# EAGLE board Hall Effect Power Panelized (EAGLE 7.6.0), part 1 of 2
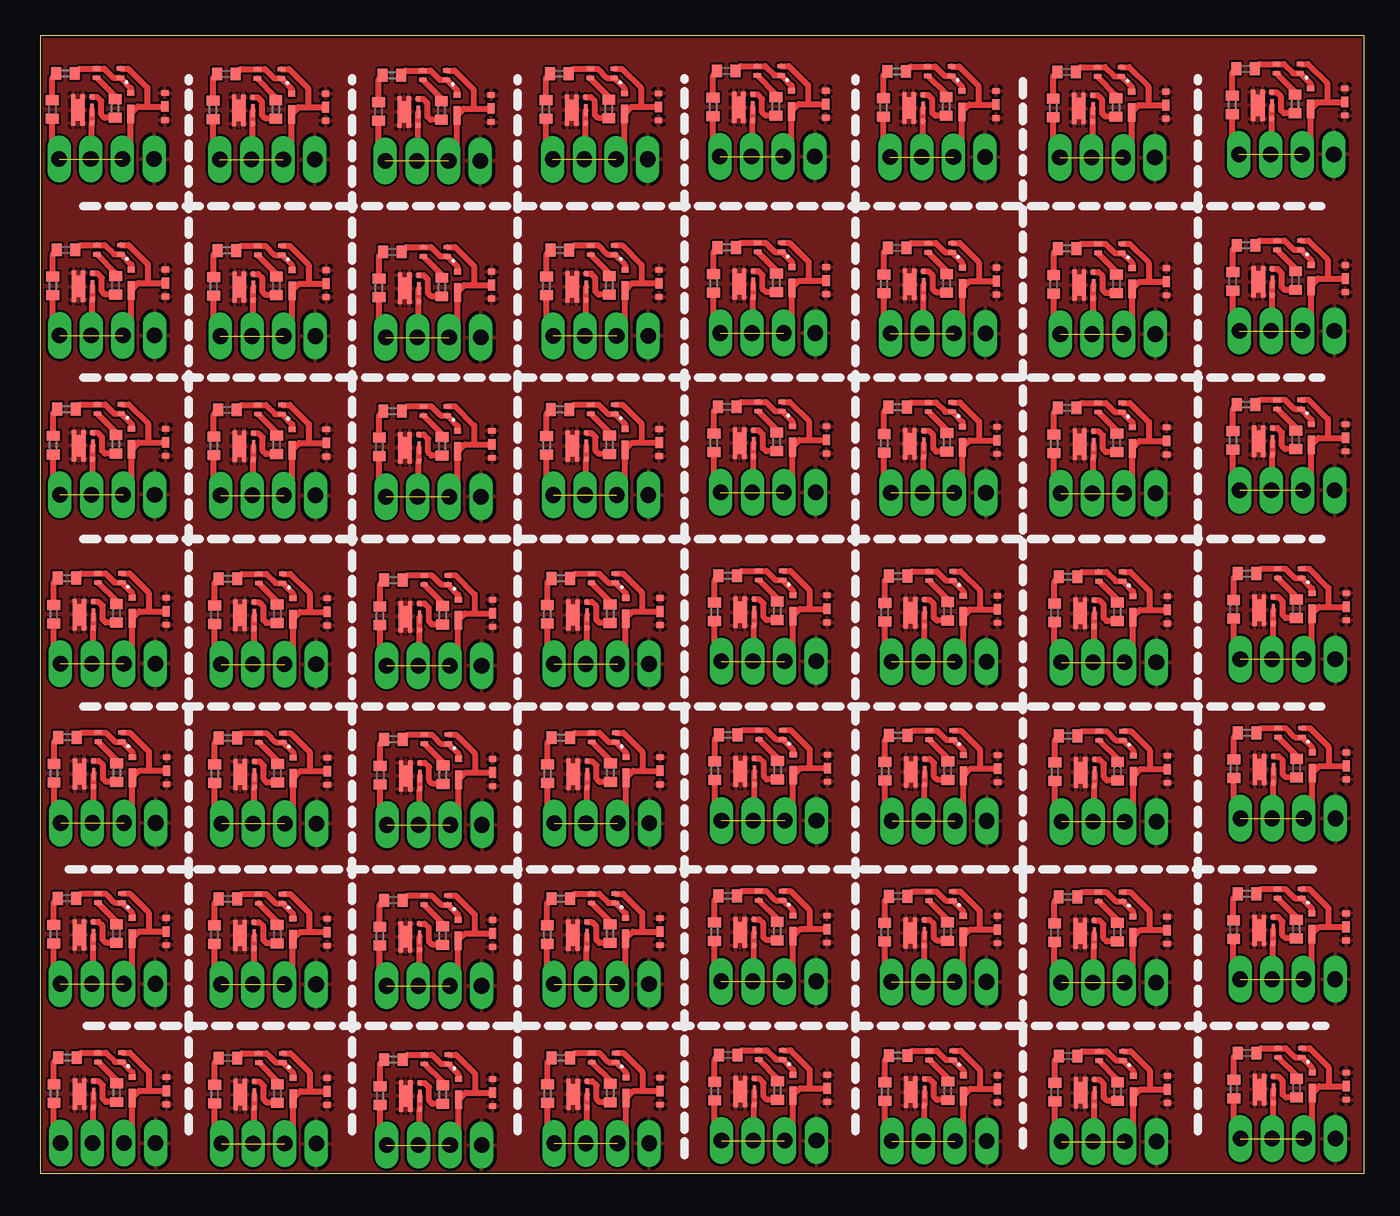
[diagram p0: board, top side]
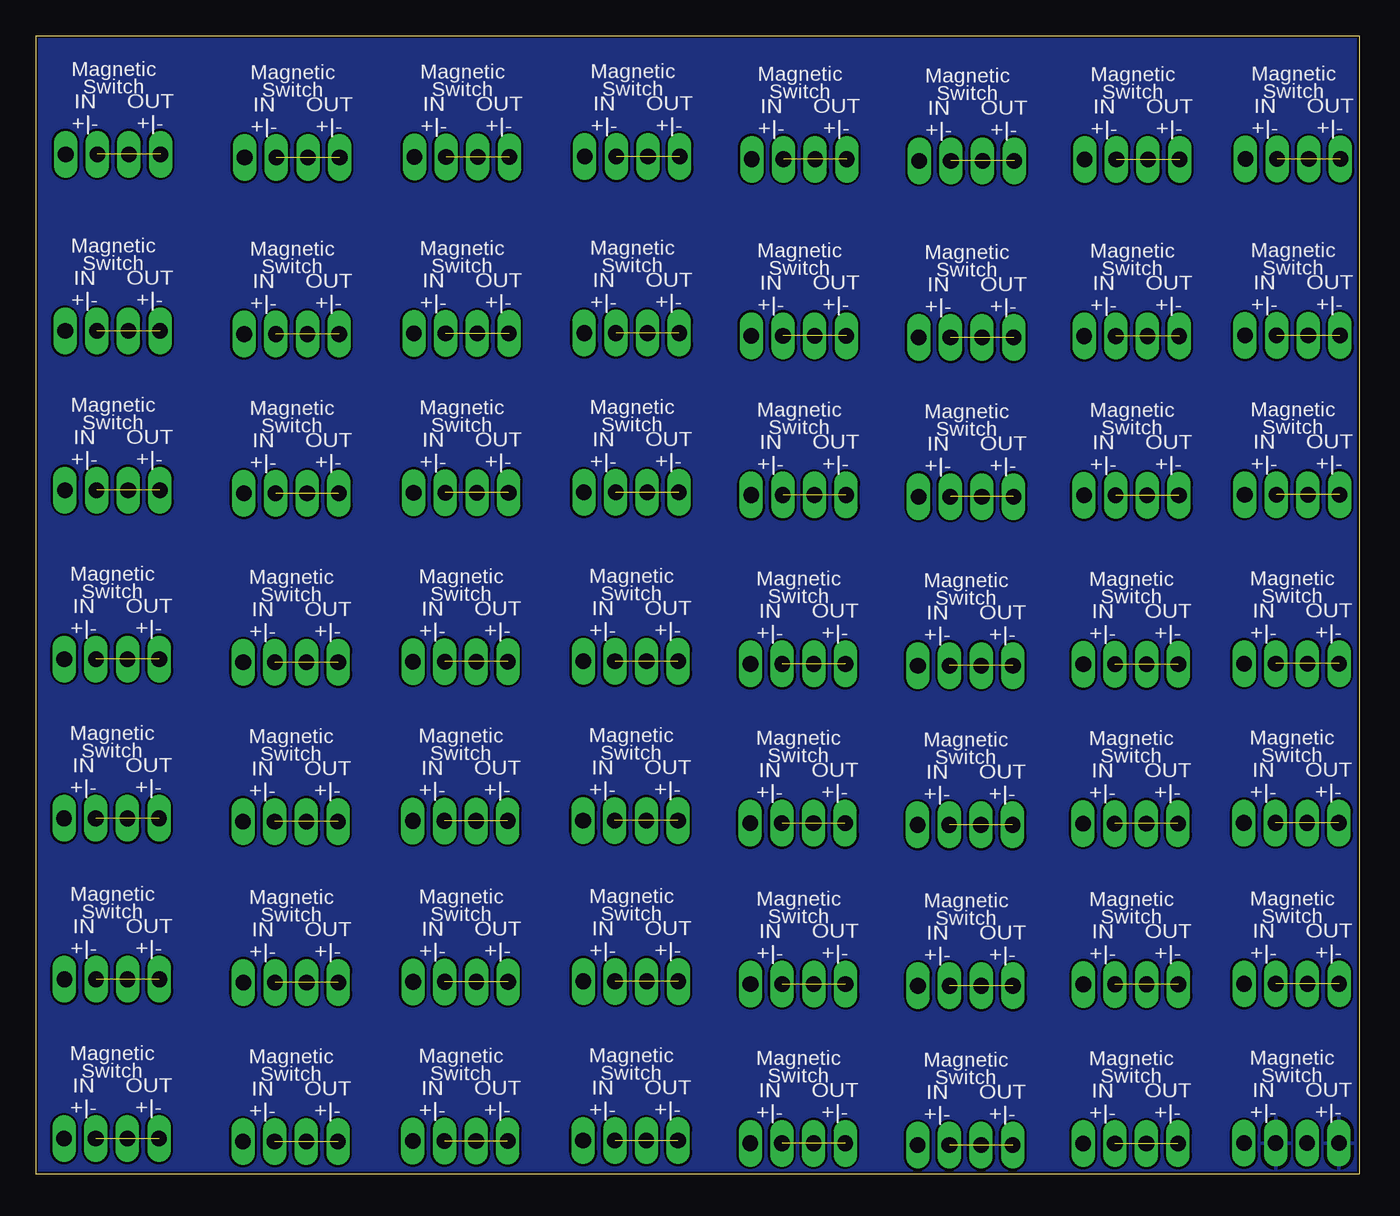
[diagram p1: board, bottom side, seen from below]

Size 93 x 80 mm. Coordinates in mm from the lower left corner, seen from the top.
Outline: 93,80 0,80 0,0 93,0 93,80
Copper layers (1*16): Top 0.035mm / dielectric 1.5mm / Bottom 0.035mm
Design rules "pcbway": minimum track width 6mil, minimum drill 12mil, track to track 6mil, track to pad 6mil, pad to pad 6mil, via to via 6mil, smd to smd 6mil, copper to edge 6mil, drill to drill 6mil, minimum pad ring 10mil, minimum via ring 8mil, stop-mask expansion 4mil, vias tented up to drill 0mil, thermal gap 10mil

## Footprints (pad centres in the part's own frame; a part is rotated, then mirrored left to right if it is on the bottom)
C0402 = smd 0.7 x 0.9: 1 -0.65,0; 2 0.65,0
HALL-MOSFET-NEW = smd 0.3 x 0.35: D#4 0,-0.925; D@2 -0.65,0.925; D@3 0,0.925; D@5 -0.65,-0.925; G@1 0.65,0.925; S@2 0.65,-0.925 | smd 0.95 x 1.5: D@1 -0.325,0 | smd 0.235 x 0.87: S@1 0.667,0
HALL-HALL-NEW = smd 0.3 x 0.52: CE -0.325,-0.84; GND -0.325,0.84; OUT 0.325,-0.84; VDD 0.325,0.84
HALL-REG-NEW = smd 0.4 x 0.5: 1 -0.95,0; 3 0.95,0; 4 0.95,2.4 | smd 0.75 x 0.5: 2 0,0 | smd 1.3 x 0.5: 5 -0.5,2.4
SINGLE-WIRE = drill 1.1 pad 1.27 long: P$1 0,0

## Placement (x,y rotation side)
3.1  RESISTORC0402  [C0402]  5.36,5.7 90 top
3.2  RESISTORC0402  [C0402]  12.24,5.62 90 top
3.3  RESISTORC0402  [C0402]  0.94,5.66 90 top
3.4  RESISTORC0402  [C0402]  16.65,5.66 90 top
3.5  RESISTORC0402  [C0402]  23.87,5.52 90 top
3.6  RESISTORC0402  [C0402]  28.28,5.57 90 top
3.7  RESISTORC0402  [C0402]  35.63,5.64 90 top
3.8  RESISTORC0402  [C0402]  40.04,5.69 90 top
3.9  RESISTORC0402  [C0402]  47.38,5.83 90 top
3.10  RESISTORC0402  [C0402]  51.79,5.88 90 top
3.11  RESISTORC0402  [C0402]  0.93,16.85 90 top
3.12  RESISTORC0402  [C0402]  5.34,16.9 90 top
3.13  RESISTORC0402  [C0402]  12.23,16.81 90 top
3.14  RESISTORC0402  [C0402]  16.64,16.86 90 top
3.15  RESISTORC0402  [C0402]  23.85,16.71 90 top
3.16  RESISTORC0402  [C0402]  28.26,16.76 90 top
3.17  RESISTORC0402  [C0402]  35.61,16.83 90 top
3.18  RESISTORC0402  [C0402]  40.03,16.88 90 top
3.19  RESISTORC0402  [C0402]  47.36,17.02 90 top
3.20  RESISTORC0402  [C0402]  51.77,17.07 90 top
3.21  RESISTORC0402  [C0402]  0.95,28.16 90 top
3.22  RESISTORC0402  [C0402]  5.36,28.2 90 top
3.23  RESISTORC0402  [C0402]  12.25,28.12 90 top
3.24  RESISTORC0402  [C0402]  16.66,28.16 90 top
3.25  RESISTORC0402  [C0402]  23.87,28.02 90 top
3.26  RESISTORC0402  [C0402]  28.28,28.07 90 top
3.27  RESISTORC0402  [C0402]  35.64,28.14 90 top
3.28  RESISTORC0402  [C0402]  40.05,28.19 90 top
3.29  RESISTORC0402  [C0402]  47.38,28.33 90 top
3.30  RESISTORC0402  [C0402]  51.8,28.37 90 top
3.31  RESISTORC0402  [C0402]  0.93,39.35 90 top
3.32  RESISTORC0402  [C0402]  5.34,39.4 90 top
3.33  RESISTORC0402  [C0402]  12.23,39.31 90 top
3.34  RESISTORC0402  [C0402]  16.64,39.35 90 top
3.35  RESISTORC0402  [C0402]  23.85,39.21 90 top
3.36  RESISTORC0402  [C0402]  28.27,39.26 90 top
3.37  RESISTORC0402  [C0402]  35.62,39.33 90 top
3.38  RESISTORC0402  [C0402]  40.03,39.38 90 top
3.39  RESISTORC0402  [C0402]  47.37,39.52 90 top
3.40  RESISTORC0402  [C0402]  51.78,39.57 90 top
3.41  RESISTORC0402  [C0402]  59.34,5.8 90 top
3.42  RESISTORC0402  [C0402]  63.76,5.84 90 top
3.43  RESISTORC0402  [C0402]  71.28,5.76 90 top
3.44  RESISTORC0402  [C0402]  75.69,5.8 90 top
3.45  RESISTORC0402  [C0402]  83.85,5.98 90 top
3.46  RESISTORC0402  [C0402]  88.26,6.02 90 top
3.47  RESISTORC0402  [C0402]  0.89,51.22 90 top
3.48  RESISTORC0402  [C0402]  5.3,51.27 90 top
3.49  RESISTORC0402  [C0402]  12.18,51.18 90 top
3.50  RESISTORC0402  [C0402]  16.6,51.23 90 top
3.51  RESISTORC0402  [C0402]  59.33,16.99 90 top
3.52  RESISTORC0402  [C0402]  63.74,17.04 90 top
3.53  RESISTORC0402  [C0402]  71.26,16.95 90 top
3.54  RESISTORC0402  [C0402]  75.67,17 90 top
3.55  RESISTORC0402  [C0402]  83.84,17.17 90 top
3.56  RESISTORC0402  [C0402]  88.25,17.22 90 top
3.57  RESISTORC0402  [C0402]  23.81,51.08 90 top
3.58  RESISTORC0402  [C0402]  28.22,51.13 90 top
3.59  RESISTORC0402  [C0402]  35.57,51.2 90 top
3.60  RESISTORC0402  [C0402]  39.98,51.25 90 top
3.61  RESISTORC0402  [C0402]  59.35,28.3 90 top
3.62  RESISTORC0402  [C0402]  63.76,28.34 90 top
3.63  RESISTORC0402  [C0402]  71.28,28.26 90 top
3.64  RESISTORC0402  [C0402]  75.69,28.3 90 top
3.65  RESISTORC0402  [C0402]  83.86,28.48 90 top
3.66  RESISTORC0402  [C0402]  88.27,28.52 90 top
3.67  RESISTORC0402  [C0402]  47.32,51.39 90 top
3.68  RESISTORC0402  [C0402]  51.73,51.44 90 top
3.69  RESISTORC0402  [C0402]  0.87,62.41 90 top
3.70  RESISTORC0402  [C0402]  5.28,62.46 90 top
3.71  RESISTORC0402  [C0402]  59.33,39.49 90 top
3.72  RESISTORC0402  [C0402]  63.74,39.54 90 top
3.73  RESISTORC0402  [C0402]  71.26,39.45 90 top
3.74  RESISTORC0402  [C0402]  75.68,39.49 90 top
3.75  RESISTORC0402  [C0402]  83.84,39.67 90 top
3.76  RESISTORC0402  [C0402]  88.25,39.72 90 top
3.77  RESISTORC0402  [C0402]  12.17,62.37 90 top
3.78  RESISTORC0402  [C0402]  16.58,62.42 90 top
3.79  RESISTORC0402  [C0402]  23.79,62.28 90 top
3.80  RESISTORC0402  [C0402]  28.2,62.32 90 top
3.81  RESISTORC0402  [C0402]  35.55,62.4 90 top
3.82  RESISTORC0402  [C0402]  39.97,62.44 90 top
3.83  RESISTORC0402  [C0402]  47.3,62.58 90 top
3.84  RESISTORC0402  [C0402]  51.71,62.63 90 top
3.85  RESISTORC0402  [C0402]  59.29,51.36 90 top
3.86  RESISTORC0402  [C0402]  63.7,51.41 90 top
3.87  RESISTORC0402  [C0402]  71.22,51.32 90 top
3.88  RESISTORC0402  [C0402]  75.63,51.37 90 top
3.89  RESISTORC0402  [C0402]  83.79,51.54 90 top
3.90  RESISTORC0402  [C0402]  88.21,51.59 90 top
3.91  RESISTORC0402  [C0402]  59.27,62.55 90 top
3.92  RESISTORC0402  [C0402]  63.68,62.6 90 top
3.93  RESISTORC0402  [C0402]  71.2,62.51 90 top
3.94  RESISTORC0402  [C0402]  75.61,62.56 90 top
3.95  RESISTORC0402  [C0402]  83.78,62.73 90 top
3.96  RESISTORC0402  [C0402]  88.19,62.78 90 top
3.97  RESISTORC0402  [C0402]  0.83,74.82 90 top
3.98  RESISTORC0402  [C0402]  5.25,74.86 90 top
3.99  RESISTORC0402  [C0402]  12.13,74.78 90 top
3.100  RESISTORC0402  [C0402]  16.54,74.82 90 top
3.101  RESISTORC0402  [C0402]  23.75,74.68 90 top
3.102  RESISTORC0402  [C0402]  28.17,74.73 90 top
3.103  RESISTORC0402  [C0402]  35.52,74.8 90 top
3.104  RESISTORC0402  [C0402]  39.93,74.85 90 top
3.105  RESISTORC0402  [C0402]  47.27,74.99 90 top
3.106  RESISTORC0402  [C0402]  51.68,75.03 90 top
3.107  RESISTORC0402  [C0402]  59.23,74.96 90 top
3.108  RESISTORC0402  [C0402]  63.64,75 90 top
3.109  RESISTORC0402  [C0402]  71.17,74.92 90 top
3.110  RESISTORC0402  [C0402]  75.58,74.96 90 top
3.111  RESISTORC0402  [C0402]  83.74,75.14 90 top
3.112  RESISTORC0402  [C0402]  88.15,75.18 90 top
4.7UF  CAPACITORC0402  [C0402]  1.88,8.18 0 top
4.7UF1  CAPACITORC0402  [C0402]  13.18,8.14 0 top
4.7UF2  CAPACITORC0402  [C0402]  24.8,8.04 0 top
4.7UF3  CAPACITORC0402  [C0402]  36.57,8.16 0 top
4.7UF4  CAPACITORC0402  [C0402]  48.32,8.35 0 top
4.7UF5  CAPACITORC0402  [C0402]  1.86,19.37 0 top
4.7UF6  CAPACITORC0402  [C0402]  13.16,19.33 0 top
4.7UF7  CAPACITORC0402  [C0402]  24.79,19.24 0 top
4.7UF8  CAPACITORC0402  [C0402]  36.55,19.35 0 top
4.7UF9  CAPACITORC0402  [C0402]  48.3,19.54 0 top
4.7UF10  CAPACITORC0402  [C0402]  1.89,30.68 0 top
4.7UF11  CAPACITORC0402  [C0402]  13.19,30.64 0 top
4.7UF12  CAPACITORC0402  [C0402]  24.81,30.54 0 top
4.7UF13  CAPACITORC0402  [C0402]  36.57,30.66 0 top
4.7UF14  CAPACITORC0402  [C0402]  48.32,30.85 0 top
4.7UF15  CAPACITORC0402  [C0402]  1.87,41.87 0 top
4.7UF16  CAPACITORC0402  [C0402]  13.17,41.83 0 top
4.7UF17  CAPACITORC0402  [C0402]  24.79,41.73 0 top
4.7UF18  CAPACITORC0402  [C0402]  36.56,41.85 0 top
4.7UF19  CAPACITORC0402  [C0402]  48.3,42.04 0 top
4.7UF20  CAPACITORC0402  [C0402]  60.28,8.32 0 top
4.7UF21  CAPACITORC0402  [C0402]  72.21,8.28 0 top
4.7UF22  CAPACITORC0402  [C0402]  84.79,8.5 0 top
4.7UF23  CAPACITORC0402  [C0402]  1.82,53.74 0 top
4.7UF24  CAPACITORC0402  [C0402]  13.12,53.7 0 top
4.7UF25  CAPACITORC0402  [C0402]  60.26,19.51 0 top
4.7UF26  CAPACITORC0402  [C0402]  72.2,19.47 0 top
4.7UF27  CAPACITORC0402  [C0402]  84.77,19.69 0 top
4.7UF28  CAPACITORC0402  [C0402]  24.74,53.61 0 top
4.7UF29  CAPACITORC0402  [C0402]  36.51,53.73 0 top
4.7UF30  CAPACITORC0402  [C0402]  60.29,30.82 0 top
4.7UF31  CAPACITORC0402  [C0402]  72.22,30.78 0 top
4.7UF32  CAPACITORC0402  [C0402]  84.8,31 0 top
4.7UF33  CAPACITORC0402  [C0402]  48.26,53.91 0 top
4.7UF34  CAPACITORC0402  [C0402]  1.81,64.94 0 top
4.7UF35  CAPACITORC0402  [C0402]  60.27,42.01 0 top
4.7UF36  CAPACITORC0402  [C0402]  72.2,41.97 0 top
4.7UF37  CAPACITORC0402  [C0402]  84.78,42.19 0 top
4.7UF38  CAPACITORC0402  [C0402]  13.1,64.89 0 top
4.7UF39  CAPACITORC0402  [C0402]  24.73,64.8 0 top
4.7UF40  CAPACITORC0402  [C0402]  36.49,64.92 0 top
4.7UF41  CAPACITORC0402  [C0402]  48.24,65.11 0 top
4.7UF42  CAPACITORC0402  [C0402]  60.22,53.88 0 top
4.7UF43  CAPACITORC0402  [C0402]  72.16,53.84 0 top
4.7UF44  CAPACITORC0402  [C0402]  84.73,54.06 0 top
4.7UF45  CAPACITORC0402  [C0402]  60.21,65.07 0 top
4.7UF46  CAPACITORC0402  [C0402]  72.14,65.03 0 top
4.7UF47  CAPACITORC0402  [C0402]  84.71,65.26 0 top
4.7UF48  CAPACITORC0402  [C0402]  1.77,77.34 0 top
4.7UF49  CAPACITORC0402  [C0402]  13.07,77.3 0 top
4.7UF50  CAPACITORC0402  [C0402]  24.69,77.2 0 top
4.7UF51  CAPACITORC0402  [C0402]  36.46,77.32 0 top
4.7UF52  CAPACITORC0402  [C0402]  48.2,77.51 0 top
4.7UF53  CAPACITORC0402  [C0402]  60.17,77.48 0 top
4.7UF54  CAPACITORC0402  [C0402]  72.1,77.44 0 top
4.7UF55  CAPACITORC0402  [C0402]  84.68,77.66 0 top
U$1  HALL-MOSFET-NEW  [HALL-MOSFET-NEW]  3.07,5.61 0 top
U$2  HALL-HALL-NEW  [HALL-HALL-NEW]  4.89,8.2 270 top
U$3  HALL-REG-NEW  [HALL-REG-NEW]  8.85,5.85 90 top
U$4  SINGLE-WIRE  [SINGLE-WIRE]  1.42,2.17 0 top
U$5  SINGLE-WIRE  [SINGLE-WIRE]  3.64,2.17 0 top
U$6  SINGLE-WIRE  [SINGLE-WIRE]  8.09,2.17 0 top
U$7  SINGLE-WIRE  [SINGLE-WIRE]  5.86,2.17 0 top
U$8  HALL-MOSFET-NEW  [HALL-MOSFET-NEW]  14.37,5.57 0 top
U$9  HALL-HALL-NEW  [HALL-HALL-NEW]  16.19,8.16 270 top
U$10  HALL-REG-NEW  [HALL-REG-NEW]  20.15,5.81 90 top
U$11  SINGLE-WIRE  [SINGLE-WIRE]  12.72,2.13 0 top
U$12  SINGLE-WIRE  [SINGLE-WIRE]  14.94,2.13 0 top
U$13  SINGLE-WIRE  [SINGLE-WIRE]  19.39,2.13 0 top
U$14  SINGLE-WIRE  [SINGLE-WIRE]  17.16,2.13 0 top
U$15  HALL-MOSFET-NEW  [HALL-MOSFET-NEW]  25.99,5.48 0 top
U$16  HALL-HALL-NEW  [HALL-HALL-NEW]  27.81,8.06 270 top
U$17  HALL-REG-NEW  [HALL-REG-NEW]  31.78,5.71 90 top
U$18  SINGLE-WIRE  [SINGLE-WIRE]  24.34,2.03 0 top
U$19  SINGLE-WIRE  [SINGLE-WIRE]  26.56,2.03 0 top
U$20  SINGLE-WIRE  [SINGLE-WIRE]  31.01,2.03 0 top
U$21  SINGLE-WIRE  [SINGLE-WIRE]  28.79,2.03 0 top
U$22  HALL-MOSFET-NEW  [HALL-MOSFET-NEW]  37.76,5.6 0 top
U$23  HALL-HALL-NEW  [HALL-HALL-NEW]  39.58,8.18 270 top
U$24  HALL-REG-NEW  [HALL-REG-NEW]  43.54,5.83 90 top
U$25  SINGLE-WIRE  [SINGLE-WIRE]  36.1,2.15 0 top
U$26  SINGLE-WIRE  [SINGLE-WIRE]  38.33,2.15 0 top
U$27  SINGLE-WIRE  [SINGLE-WIRE]  42.78,2.15 0 top
U$28  SINGLE-WIRE  [SINGLE-WIRE]  40.55,2.15 0 top
U$29  HALL-MOSFET-NEW  [HALL-MOSFET-NEW]  49.5,5.78 0 top
U$30  HALL-HALL-NEW  [HALL-HALL-NEW]  51.33,8.37 270 top
U$31  HALL-REG-NEW  [HALL-REG-NEW]  55.29,6.02 90 top
U$32  SINGLE-WIRE  [SINGLE-WIRE]  47.85,2.34 0 top
U$33  SINGLE-WIRE  [SINGLE-WIRE]  50.08,2.34 0 top
U$34  SINGLE-WIRE  [SINGLE-WIRE]  54.52,2.34 0 top
U$35  SINGLE-WIRE  [SINGLE-WIRE]  52.3,2.34 0 top
U$36  HALL-MOSFET-NEW  [HALL-MOSFET-NEW]  3.05,16.8 0 top
U$37  HALL-HALL-NEW  [HALL-HALL-NEW]  4.87,19.39 270 top
U$38  HALL-REG-NEW  [HALL-REG-NEW]  8.84,17.04 90 top
U$39  SINGLE-WIRE  [SINGLE-WIRE]  1.4,13.36 0 top
U$40  SINGLE-WIRE  [SINGLE-WIRE]  3.62,13.36 0 top
U$41  SINGLE-WIRE  [SINGLE-WIRE]  8.07,13.36 0 top
U$42  SINGLE-WIRE  [SINGLE-WIRE]  5.85,13.36 0 top
U$43  HALL-MOSFET-NEW  [HALL-MOSFET-NEW]  14.35,16.76 0 top
U$44  HALL-HALL-NEW  [HALL-HALL-NEW]  16.17,19.35 270 top
U$45  HALL-REG-NEW  [HALL-REG-NEW]  20.13,17 90 top
U$46  SINGLE-WIRE  [SINGLE-WIRE]  12.7,13.32 0 top
U$47  SINGLE-WIRE  [SINGLE-WIRE]  14.92,13.32 0 top
U$48  SINGLE-WIRE  [SINGLE-WIRE]  19.37,13.32 0 top
U$49  SINGLE-WIRE  [SINGLE-WIRE]  17.14,13.32 0 top
U$50  HALL-MOSFET-NEW  [HALL-MOSFET-NEW]  25.97,16.67 0 top
U$51  HALL-HALL-NEW  [HALL-HALL-NEW]  27.8,19.25 270 top
U$52  HALL-REG-NEW  [HALL-REG-NEW]  31.76,16.9 90 top
U$53  SINGLE-WIRE  [SINGLE-WIRE]  24.32,13.22 0 top
U$54  SINGLE-WIRE  [SINGLE-WIRE]  26.55,13.22 0 top
U$55  SINGLE-WIRE  [SINGLE-WIRE]  30.99,13.22 0 top
U$56  SINGLE-WIRE  [SINGLE-WIRE]  28.77,13.22 0 top
U$57  HALL-MOSFET-NEW  [HALL-MOSFET-NEW]  37.74,16.79 0 top
U$58  HALL-HALL-NEW  [HALL-HALL-NEW]  39.56,19.37 270 top
U$59  HALL-REG-NEW  [HALL-REG-NEW]  43.52,17.02 90 top
U$60  SINGLE-WIRE  [SINGLE-WIRE]  36.09,13.34 0 top
U$61  SINGLE-WIRE  [SINGLE-WIRE]  38.31,13.34 0 top
U$62  SINGLE-WIRE  [SINGLE-WIRE]  42.76,13.34 0 top
U$63  SINGLE-WIRE  [SINGLE-WIRE]  40.53,13.34 0 top
U$64  HALL-MOSFET-NEW  [HALL-MOSFET-NEW]  49.49,16.97 0 top
U$65  HALL-HALL-NEW  [HALL-HALL-NEW]  51.31,19.56 270 top
U$66  HALL-REG-NEW  [HALL-REG-NEW]  55.27,17.21 90 top
U$67  SINGLE-WIRE  [SINGLE-WIRE]  47.83,13.53 0 top
U$68  SINGLE-WIRE  [SINGLE-WIRE]  50.06,13.53 0 top
U$69  SINGLE-WIRE  [SINGLE-WIRE]  54.51,13.53 0 top
U$70  SINGLE-WIRE  [SINGLE-WIRE]  52.28,13.53 0 top
U$71  HALL-MOSFET-NEW  [HALL-MOSFET-NEW]  3.08,28.11 0 top
U$72  HALL-HALL-NEW  [HALL-HALL-NEW]  4.9,30.7 270 top
U$73  HALL-REG-NEW  [HALL-REG-NEW]  8.86,28.35 90 top
U$74  SINGLE-WIRE  [SINGLE-WIRE]  1.42,24.67 0 top
U$75  SINGLE-WIRE  [SINGLE-WIRE]  3.65,24.67 0 top
U$76  SINGLE-WIRE  [SINGLE-WIRE]  8.09,24.67 0 top
U$77  SINGLE-WIRE  [SINGLE-WIRE]  5.87,24.67 0 top
U$78  HALL-MOSFET-NEW  [HALL-MOSFET-NEW]  14.37,28.07 0 top
U$79  HALL-HALL-NEW  [HALL-HALL-NEW]  16.2,30.66 270 top
U$80  HALL-REG-NEW  [HALL-REG-NEW]  20.16,28.31 90 top
U$81  SINGLE-WIRE  [SINGLE-WIRE]  12.72,24.63 0 top
U$82  SINGLE-WIRE  [SINGLE-WIRE]  14.95,24.63 0 top
U$83  SINGLE-WIRE  [SINGLE-WIRE]  19.39,24.63 0 top
U$84  SINGLE-WIRE  [SINGLE-WIRE]  17.17,24.63 0 top
U$85  HALL-MOSFET-NEW  [HALL-MOSFET-NEW]  26,27.98 0 top
U$86  HALL-HALL-NEW  [HALL-HALL-NEW]  27.82,30.56 270 top
U$87  HALL-REG-NEW  [HALL-REG-NEW]  31.78,28.21 90 top
U$88  SINGLE-WIRE  [SINGLE-WIRE]  24.34,24.53 0 top
U$89  SINGLE-WIRE  [SINGLE-WIRE]  26.57,24.53 0 top
U$90  SINGLE-WIRE  [SINGLE-WIRE]  31.02,24.53 0 top
U$91  SINGLE-WIRE  [SINGLE-WIRE]  28.79,24.53 0 top
U$92  HALL-MOSFET-NEW  [HALL-MOSFET-NEW]  37.76,28.09 0 top
U$93  HALL-HALL-NEW  [HALL-HALL-NEW]  39.58,30.68 270 top
U$94  HALL-REG-NEW  [HALL-REG-NEW]  43.55,28.33 90 top
U$95  SINGLE-WIRE  [SINGLE-WIRE]  36.11,24.65 0 top
U$96  SINGLE-WIRE  [SINGLE-WIRE]  38.33,24.65 0 top
U$97  SINGLE-WIRE  [SINGLE-WIRE]  42.78,24.65 0 top
U$98  SINGLE-WIRE  [SINGLE-WIRE]  40.56,24.65 0 top
U$99  HALL-MOSFET-NEW  [HALL-MOSFET-NEW]  49.51,28.28 0 top
U$100  HALL-HALL-NEW  [HALL-HALL-NEW]  51.33,30.87 270 top
U$101  HALL-REG-NEW  [HALL-REG-NEW]  55.29,28.52 90 top
U$102  SINGLE-WIRE  [SINGLE-WIRE]  47.86,24.84 0 top
U$103  SINGLE-WIRE  [SINGLE-WIRE]  50.08,24.84 0 top
U$104  SINGLE-WIRE  [SINGLE-WIRE]  54.53,24.84 0 top
U$105  SINGLE-WIRE  [SINGLE-WIRE]  52.3,24.84 0 top
U$106  HALL-MOSFET-NEW  [HALL-MOSFET-NEW]  3.06,39.3 0 top
U$107  HALL-HALL-NEW  [HALL-HALL-NEW]  4.88,41.89 270 top
U$108  HALL-REG-NEW  [HALL-REG-NEW]  8.84,39.54 90 top
U$109  SINGLE-WIRE  [SINGLE-WIRE]  1.4,35.86 0 top
U$110  SINGLE-WIRE  [SINGLE-WIRE]  3.63,35.86 0 top
U$111  SINGLE-WIRE  [SINGLE-WIRE]  8.08,35.86 0 top
U$112  SINGLE-WIRE  [SINGLE-WIRE]  5.85,35.86 0 top
U$113  HALL-MOSFET-NEW  [HALL-MOSFET-NEW]  14.36,39.26 0 top
U$114  HALL-HALL-NEW  [HALL-HALL-NEW]  16.18,41.85 270 top
U$115  HALL-REG-NEW  [HALL-REG-NEW]  20.14,39.5 90 top
U$116  SINGLE-WIRE  [SINGLE-WIRE]  12.7,35.82 0 top
U$117  SINGLE-WIRE  [SINGLE-WIRE]  14.93,35.82 0 top
U$118  SINGLE-WIRE  [SINGLE-WIRE]  19.38,35.82 0 top
U$119  SINGLE-WIRE  [SINGLE-WIRE]  17.15,35.82 0 top
U$120  HALL-MOSFET-NEW  [HALL-MOSFET-NEW]  25.98,39.17 0 top
U$121  HALL-HALL-NEW  [HALL-HALL-NEW]  27.8,41.75 270 top
U$122  HALL-REG-NEW  [HALL-REG-NEW]  31.76,39.4 90 top
U$123  SINGLE-WIRE  [SINGLE-WIRE]  24.33,35.72 0 top
U$124  SINGLE-WIRE  [SINGLE-WIRE]  26.55,35.72 0 top
U$125  SINGLE-WIRE  [SINGLE-WIRE]  31,35.72 0 top
U$126  SINGLE-WIRE  [SINGLE-WIRE]  28.77,35.72 0 top
U$127  HALL-MOSFET-NEW  [HALL-MOSFET-NEW]  37.74,39.29 0 top
U$128  HALL-HALL-NEW  [HALL-HALL-NEW]  39.57,41.87 270 top
U$129  HALL-REG-NEW  [HALL-REG-NEW]  43.53,39.52 90 top
U$130  SINGLE-WIRE  [SINGLE-WIRE]  36.09,35.84 0 top
U$131  SINGLE-WIRE  [SINGLE-WIRE]  38.32,35.84 0 top
U$132  SINGLE-WIRE  [SINGLE-WIRE]  42.76,35.84 0 top
U$133  SINGLE-WIRE  [SINGLE-WIRE]  40.54,35.84 0 top
U$134  HALL-MOSFET-NEW  [HALL-MOSFET-NEW]  49.49,39.47 0 top
U$135  HALL-HALL-NEW  [HALL-HALL-NEW]  51.31,42.06 270 top
U$136  HALL-REG-NEW  [HALL-REG-NEW]  55.28,39.71 90 top
U$137  SINGLE-WIRE  [SINGLE-WIRE]  47.84,36.03 0 top
U$138  SINGLE-WIRE  [SINGLE-WIRE]  50.06,36.03 0 top
U$139  SINGLE-WIRE  [SINGLE-WIRE]  54.51,36.03 0 top
U$140  SINGLE-WIRE  [SINGLE-WIRE]  52.29,36.03 0 top
U$141  HALL-MOSFET-NEW  [HALL-MOSFET-NEW]  61.47,5.75 0 top
U$142  HALL-HALL-NEW  [HALL-HALL-NEW]  63.29,8.34 270 top
U$143  HALL-REG-NEW  [HALL-REG-NEW]  67.25,5.99 90 top
U$144  SINGLE-WIRE  [SINGLE-WIRE]  59.82,2.31 0 top
U$145  SINGLE-WIRE  [SINGLE-WIRE]  62.04,2.31 0 top
U$146  SINGLE-WIRE  [SINGLE-WIRE]  66.49,2.31 0 top
U$147  SINGLE-WIRE  [SINGLE-WIRE]  64.26,2.31 0 top
U$148  HALL-MOSFET-NEW  [HALL-MOSFET-NEW]  73.4,5.71 0 top
U$149  HALL-HALL-NEW  [HALL-HALL-NEW]  75.22,8.3 270 top
U$150  HALL-REG-NEW  [HALL-REG-NEW]  79.19,5.95 90 top
U$151  SINGLE-WIRE  [SINGLE-WIRE]  71.75,2.27 0 top
U$152  SINGLE-WIRE  [SINGLE-WIRE]  73.97,2.27 0 top
U$153  SINGLE-WIRE  [SINGLE-WIRE]  78.42,2.27 0 top
U$154  SINGLE-WIRE  [SINGLE-WIRE]  76.2,2.27 0 top
U$155  HALL-MOSFET-NEW  [HALL-MOSFET-NEW]  85.98,5.93 0 top
U$156  HALL-HALL-NEW  [HALL-HALL-NEW]  87.8,8.52 270 top
U$157  HALL-REG-NEW  [HALL-REG-NEW]  91.76,6.17 90 top
U$158  SINGLE-WIRE  [SINGLE-WIRE]  84.33,2.49 0 top
U$159  SINGLE-WIRE  [SINGLE-WIRE]  86.55,2.49 0 top
U$160  SINGLE-WIRE  [SINGLE-WIRE]  91,2.49 0 top
U$161  SINGLE-WIRE  [SINGLE-WIRE]  88.77,2.49 0 top
U$162  HALL-MOSFET-NEW  [HALL-MOSFET-NEW]  3.01,51.18 0 top
U$163  HALL-HALL-NEW  [HALL-HALL-NEW]  4.83,53.76 270 top
U$164  HALL-REG-NEW  [HALL-REG-NEW]  8.8,51.41 90 top
U$165  SINGLE-WIRE  [SINGLE-WIRE]  1.36,47.73 0 top
U$166  SINGLE-WIRE  [SINGLE-WIRE]  3.58,47.73 0 top
U$167  SINGLE-WIRE  [SINGLE-WIRE]  8.03,47.73 0 top
U$168  SINGLE-WIRE  [SINGLE-WIRE]  5.81,47.73 0 top
U$169  HALL-MOSFET-NEW  [HALL-MOSFET-NEW]  14.31,51.14 0 top
U$170  HALL-HALL-NEW  [HALL-HALL-NEW]  16.13,53.72 270 top
U$171  HALL-REG-NEW  [HALL-REG-NEW]  20.09,51.37 90 top
U$172  SINGLE-WIRE  [SINGLE-WIRE]  12.66,47.69 0 top
U$173  SINGLE-WIRE  [SINGLE-WIRE]  14.88,47.69 0 top
U$174  SINGLE-WIRE  [SINGLE-WIRE]  19.33,47.69 0 top
U$175  SINGLE-WIRE  [SINGLE-WIRE]  17.1,47.69 0 top
U$176  HALL-MOSFET-NEW  [HALL-MOSFET-NEW]  61.45,16.94 0 top
U$177  HALL-HALL-NEW  [HALL-HALL-NEW]  63.27,19.53 270 top
U$178  HALL-REG-NEW  [HALL-REG-NEW]  67.24,17.18 90 top
U$179  SINGLE-WIRE  [SINGLE-WIRE]  59.8,13.5 0 top
U$180  SINGLE-WIRE  [SINGLE-WIRE]  62.02,13.5 0 top
U$181  SINGLE-WIRE  [SINGLE-WIRE]  66.47,13.5 0 top
U$182  SINGLE-WIRE  [SINGLE-WIRE]  64.25,13.5 0 top
U$183  HALL-MOSFET-NEW  [HALL-MOSFET-NEW]  73.39,16.9 0 top
U$184  HALL-HALL-NEW  [HALL-HALL-NEW]  75.21,19.49 270 top
U$185  HALL-REG-NEW  [HALL-REG-NEW]  79.17,17.14 90 top
U$186  SINGLE-WIRE  [SINGLE-WIRE]  71.73,13.46 0 top
U$187  SINGLE-WIRE  [SINGLE-WIRE]  73.96,13.46 0 top
U$188  SINGLE-WIRE  [SINGLE-WIRE]  78.4,13.46 0 top
U$189  SINGLE-WIRE  [SINGLE-WIRE]  76.18,13.46 0 top
U$190  HALL-MOSFET-NEW  [HALL-MOSFET-NEW]  85.96,17.12 0 top
U$191  HALL-HALL-NEW  [HALL-HALL-NEW]  87.78,19.71 270 top
U$192  HALL-REG-NEW  [HALL-REG-NEW]  91.74,17.36 90 top
U$193  SINGLE-WIRE  [SINGLE-WIRE]  84.31,13.68 0 top
U$194  SINGLE-WIRE  [SINGLE-WIRE]  86.53,13.68 0 top
U$195  SINGLE-WIRE  [SINGLE-WIRE]  90.98,13.68 0 top
U$196  SINGLE-WIRE  [SINGLE-WIRE]  88.76,13.68 0 top
U$197  HALL-MOSFET-NEW  [HALL-MOSFET-NEW]  25.93,51.04 0 top
U$198  HALL-HALL-NEW  [HALL-HALL-NEW]  27.75,53.62 270 top
U$199  HALL-REG-NEW  [HALL-REG-NEW]  31.72,51.27 90 top
U$200  SINGLE-WIRE  [SINGLE-WIRE]  24.28,47.59 0 top
U$201  SINGLE-WIRE  [SINGLE-WIRE]  26.5,47.59 0 top
U$202  SINGLE-WIRE  [SINGLE-WIRE]  30.95,47.59 0 top
U$203  SINGLE-WIRE  [SINGLE-WIRE]  28.73,47.59 0 top
U$204  HALL-MOSFET-NEW  [HALL-MOSFET-NEW]  37.7,51.16 0 top
U$205  HALL-HALL-NEW  [HALL-HALL-NEW]  39.52,53.74 270 top
U$206  HALL-REG-NEW  [HALL-REG-NEW]  43.48,51.39 90 top
U$207  SINGLE-WIRE  [SINGLE-WIRE]  36.05,47.71 0 top
U$208  SINGLE-WIRE  [SINGLE-WIRE]  38.27,47.71 0 top
U$209  SINGLE-WIRE  [SINGLE-WIRE]  42.72,47.71 0 top
U$210  SINGLE-WIRE  [SINGLE-WIRE]  40.49,47.71 0 top
U$211  HALL-MOSFET-NEW  [HALL-MOSFET-NEW]  61.48,28.25 0 top
U$212  HALL-HALL-NEW  [HALL-HALL-NEW]  63.3,30.84 270 top
U$213  HALL-REG-NEW  [HALL-REG-NEW]  67.26,28.49 90 top
U$214  SINGLE-WIRE  [SINGLE-WIRE]  59.82,24.81 0 top
U$215  SINGLE-WIRE  [SINGLE-WIRE]  62.05,24.81 0 top
U$216  SINGLE-WIRE  [SINGLE-WIRE]  66.49,24.81 0 top
U$217  SINGLE-WIRE  [SINGLE-WIRE]  64.27,24.81 0 top
U$218  HALL-MOSFET-NEW  [HALL-MOSFET-NEW]  73.41,28.21 0 top
U$219  HALL-HALL-NEW  [HALL-HALL-NEW]  75.23,30.79 270 top
U$220  HALL-REG-NEW  [HALL-REG-NEW]  79.19,28.45 90 top
U$221  SINGLE-WIRE  [SINGLE-WIRE]  71.76,24.77 0 top
U$222  SINGLE-WIRE  [SINGLE-WIRE]  73.98,24.77 0 top
U$223  SINGLE-WIRE  [SINGLE-WIRE]  78.43,24.77 0 top
U$224  SINGLE-WIRE  [SINGLE-WIRE]  76.2,24.77 0 top
U$225  HALL-MOSFET-NEW  [HALL-MOSFET-NEW]  85.98,28.43 0 top
U$226  HALL-HALL-NEW  [HALL-HALL-NEW]  87.81,31.02 270 top
U$227  HALL-REG-NEW  [HALL-REG-NEW]  91.77,28.67 90 top
U$228  SINGLE-WIRE  [SINGLE-WIRE]  84.33,24.99 0 top
U$229  SINGLE-WIRE  [SINGLE-WIRE]  86.56,24.99 0 top
U$230  SINGLE-WIRE  [SINGLE-WIRE]  91,24.99 0 top
U$231  SINGLE-WIRE  [SINGLE-WIRE]  88.78,24.99 0 top
U$232  HALL-MOSFET-NEW  [HALL-MOSFET-NEW]  49.45,51.35 0 top
U$233  HALL-HALL-NEW  [HALL-HALL-NEW]  51.27,53.93 270 top
U$234  HALL-REG-NEW  [HALL-REG-NEW]  55.23,51.58 90 top
U$235  SINGLE-WIRE  [SINGLE-WIRE]  47.79,47.9 0 top
U$236  SINGLE-WIRE  [SINGLE-WIRE]  50.02,47.9 0 top
U$237  SINGLE-WIRE  [SINGLE-WIRE]  54.47,47.9 0 top
U$238  SINGLE-WIRE  [SINGLE-WIRE]  52.24,47.9 0 top
U$239  HALL-MOSFET-NEW  [HALL-MOSFET-NEW]  2.99,62.37 0 top
U$240  HALL-HALL-NEW  [HALL-HALL-NEW]  4.82,64.95 270 top
U$241  HALL-REG-NEW  [HALL-REG-NEW]  8.78,62.6 90 top
U$242  SINGLE-WIRE  [SINGLE-WIRE]  1.34,58.92 0 top
U$243  SINGLE-WIRE  [SINGLE-WIRE]  3.57,58.92 0 top
U$244  SINGLE-WIRE  [SINGLE-WIRE]  8.01,58.92 0 top
U$245  SINGLE-WIRE  [SINGLE-WIRE]  5.79,58.92 0 top
U$246  HALL-MOSFET-NEW  [HALL-MOSFET-NEW]  61.46,39.44 0 top
U$247  HALL-HALL-NEW  [HALL-HALL-NEW]  63.28,42.03 270 top
U$248  HALL-REG-NEW  [HALL-REG-NEW]  67.24,39.68 90 top
U$249  SINGLE-WIRE  [SINGLE-WIRE]  59.8,36 0 top
U$250  SINGLE-WIRE  [SINGLE-WIRE]  62.03,36 0 top
U$251  SINGLE-WIRE  [SINGLE-WIRE]  66.48,36 0 top
U$252  SINGLE-WIRE  [SINGLE-WIRE]  64.25,36 0 top
U$253  HALL-MOSFET-NEW  [HALL-MOSFET-NEW]  73.39,39.4 0 top
U$254  HALL-HALL-NEW  [HALL-HALL-NEW]  75.21,41.99 270 top
U$255  HALL-REG-NEW  [HALL-REG-NEW]  79.17,39.64 90 top
U$256  SINGLE-WIRE  [SINGLE-WIRE]  71.74,35.96 0 top
U$257  SINGLE-WIRE  [SINGLE-WIRE]  73.96,35.96 0 top
U$258  SINGLE-WIRE  [SINGLE-WIRE]  78.41,35.96 0 top
U$259  SINGLE-WIRE  [SINGLE-WIRE]  76.18,35.96 0 top
U$260  HALL-MOSFET-NEW  [HALL-MOSFET-NEW]  85.97,39.62 0 top
U$261  HALL-HALL-NEW  [HALL-HALL-NEW]  87.79,42.21 270 top
U$262  HALL-REG-NEW  [HALL-REG-NEW]  91.75,39.86 90 top
U$263  SINGLE-WIRE  [SINGLE-WIRE]  84.31,36.18 0 top
U$264  SINGLE-WIRE  [SINGLE-WIRE]  86.54,36.18 0 top
U$265  SINGLE-WIRE  [SINGLE-WIRE]  90.99,36.18 0 top
U$266  SINGLE-WIRE  [SINGLE-WIRE]  88.76,36.18 0 top
U$267  HALL-MOSFET-NEW  [HALL-MOSFET-NEW]  14.29,62.33 0 top
U$268  HALL-HALL-NEW  [HALL-HALL-NEW]  16.11,64.91 270 top
U$269  HALL-REG-NEW  [HALL-REG-NEW]  20.08,62.56 90 top
U$270  SINGLE-WIRE  [SINGLE-WIRE]  12.64,58.88 0 top
U$271  SINGLE-WIRE  [SINGLE-WIRE]  14.86,58.88 0 top
U$272  SINGLE-WIRE  [SINGLE-WIRE]  19.31,58.88 0 top
U$273  SINGLE-WIRE  [SINGLE-WIRE]  17.09,58.88 0 top
U$274  HALL-MOSFET-NEW  [HALL-MOSFET-NEW]  25.92,62.23 0 top
U$275  HALL-HALL-NEW  [HALL-HALL-NEW]  27.74,64.81 270 top
U$276  HALL-REG-NEW  [HALL-REG-NEW]  31.7,62.47 90 top
U$277  SINGLE-WIRE  [SINGLE-WIRE]  24.26,58.79 0 top
U$278  SINGLE-WIRE  [SINGLE-WIRE]  26.49,58.79 0 top
U$279  SINGLE-WIRE  [SINGLE-WIRE]  30.93,58.79 0 top
U$280  SINGLE-WIRE  [SINGLE-WIRE]  28.71,58.79 0 top
U$281  HALL-MOSFET-NEW  [HALL-MOSFET-NEW]  37.68,62.35 0 top
U$282  HALL-HALL-NEW  [HALL-HALL-NEW]  39.5,64.93 270 top
U$283  HALL-REG-NEW  [HALL-REG-NEW]  43.46,62.59 90 top
U$284  SINGLE-WIRE  [SINGLE-WIRE]  36.03,58.91 0 top
U$285  SINGLE-WIRE  [SINGLE-WIRE]  38.25,58.91 0 top
U$286  SINGLE-WIRE  [SINGLE-WIRE]  42.7,58.91 0 top
U$287  SINGLE-WIRE  [SINGLE-WIRE]  40.47,58.91 0 top
U$288  HALL-MOSFET-NEW  [HALL-MOSFET-NEW]  49.43,62.54 0 top
U$289  HALL-HALL-NEW  [HALL-HALL-NEW]  51.25,65.12 270 top
U$290  HALL-REG-NEW  [HALL-REG-NEW]  55.21,62.77 90 top
U$291  SINGLE-WIRE  [SINGLE-WIRE]  47.77,59.09 0 top
U$292  SINGLE-WIRE  [SINGLE-WIRE]  50,59.09 0 top
U$293  SINGLE-WIRE  [SINGLE-WIRE]  54.45,59.09 0 top
U$294  SINGLE-WIRE  [SINGLE-WIRE]  52.22,59.09 0 top
U$295  HALL-MOSFET-NEW  [HALL-MOSFET-NEW]  61.41,51.32 0 top
U$296  HALL-HALL-NEW  [HALL-HALL-NEW]  63.23,53.9 270 top
U$297  HALL-REG-NEW  [HALL-REG-NEW]  67.2,51.55 90 top
U$298  SINGLE-WIRE  [SINGLE-WIRE]  59.76,47.87 0 top
U$299  SINGLE-WIRE  [SINGLE-WIRE]  61.98,47.87 0 top
U$300  SINGLE-WIRE  [SINGLE-WIRE]  66.43,47.87 0 top
U$301  SINGLE-WIRE  [SINGLE-WIRE]  64.21,47.87 0 top
U$302  HALL-MOSFET-NEW  [HALL-MOSFET-NEW]  73.35,51.27 0 top
U$303  HALL-HALL-NEW  [HALL-HALL-NEW]  75.17,53.86 270 top
U$304  HALL-REG-NEW  [HALL-REG-NEW]  79.13,51.51 90 top
U$305  SINGLE-WIRE  [SINGLE-WIRE]  71.69,47.83 0 top
U$306  SINGLE-WIRE  [SINGLE-WIRE]  73.92,47.83 0 top
U$307  SINGLE-WIRE  [SINGLE-WIRE]  78.36,47.83 0 top
U$308  SINGLE-WIRE  [SINGLE-WIRE]  76.14,47.83 0 top
U$309  HALL-MOSFET-NEW  [HALL-MOSFET-NEW]  85.92,51.5 0 top
U$310  HALL-HALL-NEW  [HALL-HALL-NEW]  87.74,54.08 270 top
U$311  HALL-REG-NEW  [HALL-REG-NEW]  91.7,51.73 90 top
U$312  SINGLE-WIRE  [SINGLE-WIRE]  84.27,48.05 0 top
U$313  SINGLE-WIRE  [SINGLE-WIRE]  86.49,48.05 0 top
U$314  SINGLE-WIRE  [SINGLE-WIRE]  90.94,48.05 0 top
U$315  SINGLE-WIRE  [SINGLE-WIRE]  88.71,48.05 0 top
U$316  HALL-MOSFET-NEW  [HALL-MOSFET-NEW]  61.39,62.51 0 top
U$317  HALL-HALL-NEW  [HALL-HALL-NEW]  63.22,65.09 270 top
U$318  HALL-REG-NEW  [HALL-REG-NEW]  67.18,62.74 90 top
U$319  SINGLE-WIRE  [SINGLE-WIRE]  59.74,59.06 0 top
U$320  SINGLE-WIRE  [SINGLE-WIRE]  61.97,59.06 0 top
U$321  SINGLE-WIRE  [SINGLE-WIRE]  66.41,59.06 0 top
U$322  SINGLE-WIRE  [SINGLE-WIRE]  64.19,59.06 0 top
U$323  HALL-MOSFET-NEW  [HALL-MOSFET-NEW]  73.33,62.47 0 top
U$324  HALL-HALL-NEW  [HALL-HALL-NEW]  75.15,65.05 270 top
U$325  HALL-REG-NEW  [HALL-REG-NEW]  79.11,62.7 90 top
U$326  SINGLE-WIRE  [SINGLE-WIRE]  71.67,59.02 0 top
U$327  SINGLE-WIRE  [SINGLE-WIRE]  73.9,59.02 0 top
U$328  SINGLE-WIRE  [SINGLE-WIRE]  78.35,59.02 0 top
U$329  SINGLE-WIRE  [SINGLE-WIRE]  76.12,59.02 0 top
U$330  HALL-MOSFET-NEW  [HALL-MOSFET-NEW]  85.9,62.69 0 top
U$331  HALL-HALL-NEW  [HALL-HALL-NEW]  87.72,65.27 270 top
U$332  HALL-REG-NEW  [HALL-REG-NEW]  91.69,62.92 90 top
U$333  SINGLE-WIRE  [SINGLE-WIRE]  84.25,59.24 0 top
U$334  SINGLE-WIRE  [SINGLE-WIRE]  86.47,59.24 0 top
U$335  SINGLE-WIRE  [SINGLE-WIRE]  90.92,59.24 0 top
U$336  SINGLE-WIRE  [SINGLE-WIRE]  88.7,59.24 0 top
U$337  HALL-MOSFET-NEW  [HALL-MOSFET-NEW]  2.96,74.77 0 top
U$338  HALL-HALL-NEW  [HALL-HALL-NEW]  4.78,77.36 270 top
U$339  HALL-REG-NEW  [HALL-REG-NEW]  8.74,75.01 90 top
U$340  SINGLE-WIRE  [SINGLE-WIRE]  1.31,71.33 0 top
U$341  SINGLE-WIRE  [SINGLE-WIRE]  3.53,71.33 0 top
U$342  SINGLE-WIRE  [SINGLE-WIRE]  7.98,71.33 0 top
U$343  SINGLE-WIRE  [SINGLE-WIRE]  5.75,71.33 0 top
U$344  HALL-MOSFET-NEW  [HALL-MOSFET-NEW]  14.26,74.73 0 top
U$345  HALL-HALL-NEW  [HALL-HALL-NEW]  16.08,77.32 270 top
U$346  HALL-REG-NEW  [HALL-REG-NEW]  20.04,74.97 90 top
U$347  SINGLE-WIRE  [SINGLE-WIRE]  12.6,71.29 0 top
U$348  SINGLE-WIRE  [SINGLE-WIRE]  14.83,71.29 0 top
U$349  SINGLE-WIRE  [SINGLE-WIRE]  19.28,71.29 0 top
U$350  SINGLE-WIRE  [SINGLE-WIRE]  17.05,71.29 0 top
U$351  HALL-MOSFET-NEW  [HALL-MOSFET-NEW]  25.88,74.64 0 top
U$352  HALL-HALL-NEW  [HALL-HALL-NEW]  27.7,77.22 270 top
U$353  HALL-REG-NEW  [HALL-REG-NEW]  31.66,74.87 90 top
U$354  SINGLE-WIRE  [SINGLE-WIRE]  24.23,71.19 0 top
U$355  SINGLE-WIRE  [SINGLE-WIRE]  26.45,71.19 0 top
U$356  SINGLE-WIRE  [SINGLE-WIRE]  30.9,71.19 0 top
U$357  SINGLE-WIRE  [SINGLE-WIRE]  28.67,71.19 0 top
U$358  HALL-MOSFET-NEW  [HALL-MOSFET-NEW]  37.65,74.75 0 top
U$359  HALL-HALL-NEW  [HALL-HALL-NEW]  39.47,77.34 270 top
U$360  HALL-REG-NEW  [HALL-REG-NEW]  43.43,74.99 90 top
U$361  SINGLE-WIRE  [SINGLE-WIRE]  35.99,71.31 0 top
U$362  SINGLE-WIRE  [SINGLE-WIRE]  38.22,71.31 0 top
U$363  SINGLE-WIRE  [SINGLE-WIRE]  42.66,71.31 0 top
U$364  SINGLE-WIRE  [SINGLE-WIRE]  40.44,71.31 0 top
U$365  HALL-MOSFET-NEW  [HALL-MOSFET-NEW]  49.39,74.94 0 top
U$366  HALL-HALL-NEW  [HALL-HALL-NEW]  51.21,77.53 270 top
U$367  HALL-REG-NEW  [HALL-REG-NEW]  55.18,75.18 90 top
U$368  SINGLE-WIRE  [SINGLE-WIRE]  47.74,71.5 0 top
U$369  SINGLE-WIRE  [SINGLE-WIRE]  49.96,71.5 0 top
U$370  SINGLE-WIRE  [SINGLE-WIRE]  54.41,71.5 0 top
U$371  SINGLE-WIRE  [SINGLE-WIRE]  52.19,71.5 0 top
U$372  HALL-MOSFET-NEW  [HALL-MOSFET-NEW]  61.36,74.91 0 top
U$373  HALL-HALL-NEW  [HALL-HALL-NEW]  63.18,77.5 270 top
U$374  HALL-REG-NEW  [HALL-REG-NEW]  67.14,75.15 90 top
U$375  SINGLE-WIRE  [SINGLE-WIRE]  59.71,71.47 0 top
U$376  SINGLE-WIRE  [SINGLE-WIRE]  61.93,71.47 0 top
U$377  SINGLE-WIRE  [SINGLE-WIRE]  66.38,71.47 0 top
U$378  SINGLE-WIRE  [SINGLE-WIRE]  64.15,71.47 0 top
U$379  HALL-MOSFET-NEW  [HALL-MOSFET-NEW]  73.29,74.87 0 top
U$380  HALL-HALL-NEW  [HALL-HALL-NEW]  75.11,77.45 270 top
U$381  HALL-REG-NEW  [HALL-REG-NEW]  79.08,75.11 90 top
U$382  SINGLE-WIRE  [SINGLE-WIRE]  71.64,71.43 0 top
U$383  SINGLE-WIRE  [SINGLE-WIRE]  73.86,71.43 0 top
U$384  SINGLE-WIRE  [SINGLE-WIRE]  78.31,71.43 0 top
U$385  SINGLE-WIRE  [SINGLE-WIRE]  76.09,71.43 0 top
U$386  HALL-MOSFET-NEW  [HALL-MOSFET-NEW]  85.87,75.09 0 top
U$387  HALL-HALL-NEW  [HALL-HALL-NEW]  87.69,77.68 270 top
U$388  HALL-REG-NEW  [HALL-REG-NEW]  91.65,75.33 90 top
U$389  SINGLE-WIRE  [SINGLE-WIRE]  84.21,71.65 0 top
U$390  SINGLE-WIRE  [SINGLE-WIRE]  86.44,71.65 0 top
U$391  SINGLE-WIRE  [SINGLE-WIRE]  90.89,71.65 0 top
U$392  SINGLE-WIRE  [SINGLE-WIRE]  88.66,71.65 0 top

## Library data of the parts
3.1-3.112 4.7UF 4.7UF1-4.7UF55 U$1-U$392 = RocketControlBoard

## Nets
GND: 3.3.1 U$2.GND U$3.2 U$3.5 U$4.P$1 U$7.P$1
GND1: 3.2.1 U$9.GND U$10.2 U$10.5 U$11.P$1 U$14.P$1
GND2: 3.5.1 U$16.GND U$17.2 U$17.5 U$18.P$1 U$21.P$1
GND3: 3.7.1 U$23.GND U$24.2 U$24.5 U$25.P$1 U$28.P$1
GND4: 3.9.1 U$30.GND U$31.2 U$31.5 U$32.P$1 U$35.P$1
GND5: 3.11.1 U$37.GND U$38.2 U$38.5 U$39.P$1 U$42.P$1
GND6: 3.13.1 U$44.GND U$45.2 U$45.5 U$46.P$1 U$49.P$1
GND7: 3.15.1 U$51.GND U$52.2 U$52.5 U$53.P$1 U$56.P$1
GND8: 3.17.1 U$58.GND U$59.2 U$59.5 U$60.P$1 U$63.P$1
GND9: 3.19.1 U$65.GND U$66.2 U$66.5 U$67.P$1 U$70.P$1
GND10: 3.21.1 U$72.GND U$73.2 U$73.5 U$74.P$1 U$77.P$1
GND11: 3.23.1 U$79.GND U$80.2 U$80.5 U$81.P$1 U$84.P$1
GND12: 3.25.1 U$86.GND U$87.2 U$87.5 U$88.P$1 U$91.P$1
GND13: 3.27.1 U$93.GND U$94.2 U$94.5 U$95.P$1 U$98.P$1
GND14: 3.29.1 U$100.GND U$101.2 U$101.5 U$102.P$1 U$105.P$1
GND15: 3.31.1 U$107.GND U$108.2 U$108.5 U$109.P$1 U$112.P$1
GND16: 3.33.1 U$114.GND U$115.2 U$115.5 U$116.P$1 U$119.P$1
GND17: 3.35.1 U$121.GND U$122.2 U$122.5 U$123.P$1 U$126.P$1
GND18: 3.37.1 U$128.GND U$129.2 U$129.5 U$130.P$1 U$133.P$1
GND19: 3.39.1 U$135.GND U$136.2 U$136.5 U$137.P$1 U$140.P$1
GND20: 3.41.1 U$142.GND U$143.2 U$143.5 U$144.P$1 U$147.P$1
GND21: 3.43.1 U$149.GND U$150.2 U$150.5 U$151.P$1 U$154.P$1
GND22: 3.45.1 U$156.GND U$157.2 U$157.5 U$158.P$1 U$161.P$1
GND23: 3.47.1 U$163.GND U$164.2 U$164.5 U$165.P$1 U$168.P$1
GND24: 3.49.1 U$170.GND U$171.2 U$171.5 U$172.P$1 U$175.P$1
GND25: 3.51.1 U$177.GND U$178.2 U$178.5 U$179.P$1 U$182.P$1
GND26: 3.53.1 U$184.GND U$185.2 U$185.5 U$186.P$1 U$189.P$1
GND27: 3.55.1 U$191.GND U$192.2 U$192.5 U$193.P$1 U$196.P$1
GND28: 3.57.1 U$198.GND U$199.2 U$199.5 U$200.P$1 U$203.P$1
GND29: 3.59.1 U$205.GND U$206.2 U$206.5 U$207.P$1 U$210.P$1
GND30: 3.61.1 U$212.GND U$213.2 U$213.5 U$214.P$1 U$217.P$1
GND31: 3.63.1 U$219.GND U$220.2 U$220.5 U$221.P$1 U$224.P$1
GND32: 3.65.1 U$226.GND U$227.2 U$227.5 U$228.P$1 U$231.P$1
GND33: 3.67.1 U$233.GND U$234.2 U$234.5 U$235.P$1 U$238.P$1
GND34: 3.69.1 U$240.GND U$241.2 U$241.5 U$242.P$1 U$245.P$1
GND35: 3.71.1 U$247.GND U$248.2 U$248.5 U$249.P$1 U$252.P$1
GND36: 3.73.1 U$254.GND U$255.2 U$255.5 U$256.P$1 U$259.P$1
GND37: 3.75.1 U$261.GND U$262.2 U$262.5 U$263.P$1 U$266.P$1
GND38: 3.77.1 U$268.GND U$269.2 U$269.5 U$270.P$1 U$273.P$1
GND39: 3.79.1 U$275.GND U$276.2 U$276.5 U$277.P$1 U$280.P$1
GND40: 3.81.1 U$282.GND U$283.2 U$283.5 U$284.P$1 U$287.P$1
GND41: 3.83.1 U$289.GND U$290.2 U$290.5 U$291.P$1 U$294.P$1
GND42: 3.85.1 U$296.GND U$297.2 U$297.5 U$298.P$1 U$301.P$1
GND43: 3.87.1 U$303.GND U$304.2 U$304.5 U$305.P$1 U$308.P$1
GND44: 3.89.1 U$310.GND U$311.2 U$311.5 U$312.P$1 U$315.P$1
GND45: 3.91.1 U$317.GND U$318.2 U$318.5 U$319.P$1 U$322.P$1
GND46: 3.93.1 U$324.GND U$325.2 U$325.5 U$326.P$1 U$329.P$1
GND47: 3.95.1 U$331.GND U$332.2 U$332.5 U$333.P$1 U$336.P$1
GND48: 3.97.1 U$338.GND U$339.2 U$339.5 U$340.P$1 U$343.P$1
GND49: 3.99.1 U$345.GND U$346.2 U$346.5 U$347.P$1 U$350.P$1
GND50: 3.101.1 U$352.GND U$353.2 U$353.5 U$354.P$1 U$357.P$1
GND51: 3.103.1 U$359.GND U$360.2 U$360.5 U$361.P$1 U$364.P$1
GND52: 3.105.1 U$366.GND U$367.2 U$367.5 U$368.P$1 U$371.P$1
GND53: 3.107.1 U$373.GND U$374.2 U$374.5 U$375.P$1 U$378.P$1
GND54: 3.109.1 U$380.GND U$381.2 U$381.5 U$382.P$1 U$385.P$1
GND55: 3.111.1 U$387.GND U$388.2 U$388.5 U$389.P$1 U$392.P$1
HALL_OUT: 3.1.2 U$2.OUT
HALL_OUT1: 3.4.2 U$9.OUT
HALL_OUT2: 3.6.2 U$16.OUT
HALL_OUT3: 3.8.2 U$23.OUT
HALL_OUT4: 3.10.2 U$30.OUT
HALL_OUT5: 3.12.2 U$37.OUT
HALL_OUT6: 3.14.2 U$44.OUT
HALL_OUT7: 3.16.2 U$51.OUT
HALL_OUT8: 3.18.2 U$58.OUT
HALL_OUT9: 3.20.2 U$65.OUT
HALL_OUT10: 3.22.2 U$72.OUT
HALL_OUT11: 3.24.2 U$79.OUT
HALL_OUT12: 3.26.2 U$86.OUT
HALL_OUT13: 3.28.2 U$93.OUT
HALL_OUT14: 3.30.2 U$100.OUT
HALL_OUT15: 3.32.2 U$107.OUT
HALL_OUT16: 3.34.2 U$114.OUT
HALL_OUT17: 3.36.2 U$121.OUT
HALL_OUT18: 3.38.2 U$128.OUT
HALL_OUT19: 3.40.2 U$135.OUT
HALL_OUT20: 3.42.2 U$142.OUT
HALL_OUT21: 3.44.2 U$149.OUT
HALL_OUT22: 3.46.2 U$156.OUT
HALL_OUT23: 3.48.2 U$163.OUT
HALL_OUT24: 3.50.2 U$170.OUT
HALL_OUT25: 3.52.2 U$177.OUT
HALL_OUT26: 3.54.2 U$184.OUT
HALL_OUT27: 3.56.2 U$191.OUT
HALL_OUT28: 3.58.2 U$198.OUT
HALL_OUT29: 3.60.2 U$205.OUT
HALL_OUT30: 3.62.2 U$212.OUT
HALL_OUT31: 3.64.2 U$219.OUT
HALL_OUT32: 3.66.2 U$226.OUT
HALL_OUT33: 3.68.2 U$233.OUT
HALL_OUT34: 3.70.2 U$240.OUT
HALL_OUT35: 3.72.2 U$247.OUT
HALL_OUT36: 3.74.2 U$254.OUT
HALL_OUT37: 3.76.2 U$261.OUT
HALL_OUT38: 3.78.2 U$268.OUT
HALL_OUT39: 3.80.2 U$275.OUT
HALL_OUT40: 3.82.2 U$282.OUT
HALL_OUT41: 3.84.2 U$289.OUT
HALL_OUT42: 3.86.2 U$296.OUT
HALL_OUT43: 3.88.2 U$303.OUT
HALL_OUT44: 3.90.2 U$310.OUT
HALL_OUT45: 3.92.2 U$317.OUT
HALL_OUT46: 3.94.2 U$324.OUT
HALL_OUT47: 3.96.2 U$331.OUT
HALL_OUT48: 3.98.2 U$338.OUT
HALL_OUT49: 3.100.2 U$345.OUT
HALL_OUT50: 3.102.2 U$352.OUT
HALL_OUT51: 3.104.2 U$359.OUT
HALL_OUT52: 3.106.2 U$366.OUT
HALL_OUT53: 3.108.2 U$373.OUT
HALL_OUT54: 3.110.2 U$380.OUT
HALL_OUT55: 3.112.2 U$387.OUT
N$1: 4.7UF.2 U$2.CE U$2.VDD U$3.4
N$2: 3.3.2 4.7UF.1
N$3: 3.1.1 U$1.G@1
N$4: 4.7UF1.2 U$9.CE U$9.VDD U$10.4
N$5: 3.2.2 4.7UF1.1
N$6: 3.4.1 U$8.G@1
N$7: 4.7UF2.2 U$16.CE U$16.VDD U$17.4
N$8: 3.5.2 4.7UF2.1
N$9: 3.6.1 U$15.G@1
N$10: 4.7UF3.2 U$23.CE U$23.VDD U$24.4
N$11: 3.7.2 4.7UF3.1
N$12: 3.8.1 U$22.G@1
N$13: 4.7UF4.2 U$30.CE U$30.VDD U$31.4
N$14: 3.9.2 4.7UF4.1
N$15: 3.10.1 U$29.G@1
N$16: 4.7UF5.2 U$37.CE U$37.VDD U$38.4
N$17: 3.11.2 4.7UF5.1
N$18: 3.12.1 U$36.G@1
N$19: 4.7UF6.2 U$44.CE U$44.VDD U$45.4
N$20: 3.13.2 4.7UF6.1
N$21: 3.14.1 U$43.G@1
N$22: 4.7UF7.2 U$51.CE U$51.VDD U$52.4
N$23: 3.15.2 4.7UF7.1
N$24: 3.16.1 U$50.G@1
N$25: 4.7UF8.2 U$58.CE U$58.VDD U$59.4
N$26: 3.17.2 4.7UF8.1
N$27: 3.18.1 U$57.G@1
N$28: 4.7UF9.2 U$65.CE U$65.VDD U$66.4
N$29: 3.19.2 4.7UF9.1
N$30: 3.20.1 U$64.G@1
N$31: 4.7UF10.2 U$72.CE U$72.VDD U$73.4
N$32: 3.21.2 4.7UF10.1
N$33: 3.22.1 U$71.G@1
N$34: 4.7UF11.2 U$79.CE U$79.VDD U$80.4
N$35: 3.23.2 4.7UF11.1
N$36: 3.24.1 U$78.G@1
N$37: 4.7UF12.2 U$86.CE U$86.VDD U$87.4
N$38: 3.25.2 4.7UF12.1
N$39: 3.26.1 U$85.G@1
N$40: 4.7UF13.2 U$93.CE U$93.VDD U$94.4
N$41: 3.27.2 4.7UF13.1
N$42: 3.28.1 U$92.G@1
N$43: 4.7UF14.2 U$100.CE U$100.VDD U$101.4
N$44: 3.29.2 4.7UF14.1
N$45: 3.30.1 U$99.G@1
N$46: 4.7UF15.2 U$107.CE U$107.VDD U$108.4
N$47: 3.31.2 4.7UF15.1
N$48: 3.32.1 U$106.G@1
N$49: 4.7UF16.2 U$114.CE U$114.VDD U$115.4
N$50: 3.33.2 4.7UF16.1
N$51: 3.34.1 U$113.G@1
N$52: 4.7UF17.2 U$121.CE U$121.VDD U$122.4
N$53: 3.35.2 4.7UF17.1
N$54: 3.36.1 U$120.G@1
N$55: 4.7UF18.2 U$128.CE U$128.VDD U$129.4
N$56: 3.37.2 4.7UF18.1
N$57: 3.38.1 U$127.G@1
N$58: 4.7UF19.2 U$135.CE U$135.VDD U$136.4
N$59: 3.39.2 4.7UF19.1
N$60: 3.40.1 U$134.G@1
N$61: 4.7UF20.2 U$142.CE U$142.VDD U$143.4
N$62: 3.41.2 4.7UF20.1
N$63: 3.42.1 U$141.G@1
N$64: 4.7UF21.2 U$149.CE U$149.VDD U$150.4
N$65: 3.43.2 4.7UF21.1
N$66: 3.44.1 U$148.G@1
N$67: 4.7UF22.2 U$156.CE U$156.VDD U$157.4
N$68: 3.45.2 4.7UF22.1
N$69: 3.46.1 U$155.G@1
N$70: 4.7UF23.2 U$163.CE U$163.VDD U$164.4
N$71: 3.47.2 4.7UF23.1
N$72: 3.48.1 U$162.G@1
N$73: 4.7UF24.2 U$170.CE U$170.VDD U$171.4
N$74: 3.49.2 4.7UF24.1
N$75: 3.50.1 U$169.G@1
N$76: 4.7UF25.2 U$177.CE U$177.VDD U$178.4
N$77: 3.51.2 4.7UF25.1
N$78: 3.52.1 U$176.G@1
N$79: 4.7UF26.2 U$184.CE U$184.VDD U$185.4
N$80: 3.53.2 4.7UF26.1
N$81: 3.54.1 U$183.G@1
N$82: 4.7UF27.2 U$191.CE U$191.VDD U$192.4
N$83: 3.55.2 4.7UF27.1
N$84: 3.56.1 U$190.G@1
N$85: 4.7UF28.2 U$198.CE U$198.VDD U$199.4
N$86: 3.57.2 4.7UF28.1
N$87: 3.58.1 U$197.G@1
N$88: 4.7UF29.2 U$205.CE U$205.VDD U$206.4
N$89: 3.59.2 4.7UF29.1
N$90: 3.60.1 U$204.G@1
N$91: 4.7UF30.2 U$212.CE U$212.VDD U$213.4
N$92: 3.61.2 4.7UF30.1
N$93: 3.62.1 U$211.G@1
N$94: 4.7UF31.2 U$219.CE U$219.VDD U$220.4
N$95: 3.63.2 4.7UF31.1
N$96: 3.64.1 U$218.G@1
N$97: 4.7UF32.2 U$226.CE U$226.VDD U$227.4
N$98: 3.65.2 4.7UF32.1
N$99: 3.66.1 U$225.G@1
N$100: 4.7UF33.2 U$233.CE U$233.VDD U$234.4
N$101: 3.67.2 4.7UF33.1
N$102: 3.68.1 U$232.G@1
N$103: 4.7UF34.2 U$240.CE U$240.VDD U$241.4
N$104: 3.69.2 4.7UF34.1
N$105: 3.70.1 U$239.G@1
N$106: 4.7UF35.2 U$247.CE U$247.VDD U$248.4
N$107: 3.71.2 4.7UF35.1
N$108: 3.72.1 U$246.G@1
N$109: 4.7UF36.2 U$254.CE U$254.VDD U$255.4
N$110: 3.73.2 4.7UF36.1
N$111: 3.74.1 U$253.G@1
N$112: 4.7UF37.2 U$261.CE U$261.VDD U$262.4
N$113: 3.75.2 4.7UF37.1
N$114: 3.76.1 U$260.G@1
N$115: 4.7UF38.2 U$268.CE U$268.VDD U$269.4
N$116: 3.77.2 4.7UF38.1
N$117: 3.78.1 U$267.G@1
N$118: 4.7UF39.2 U$275.CE U$275.VDD U$276.4
N$119: 3.79.2 4.7UF39.1
N$120: 3.80.1 U$274.G@1
N$121: 4.7UF40.2 U$282.CE U$282.VDD U$283.4
N$122: 3.81.2 4.7UF40.1
N$123: 3.82.1 U$281.G@1
N$124: 4.7UF41.2 U$289.CE U$289.VDD U$290.4
N$125: 3.83.2 4.7UF41.1
N$126: 3.84.1 U$288.G@1
N$127: 4.7UF42.2 U$296.CE U$296.VDD U$297.4
N$128: 3.85.2 4.7UF42.1
N$129: 3.86.1 U$295.G@1
N$130: 4.7UF43.2 U$303.CE U$303.VDD U$304.4
N$131: 3.87.2 4.7UF43.1
N$132: 3.88.1 U$302.G@1
N$133: 4.7UF44.2 U$310.CE U$310.VDD U$311.4
N$134: 3.89.2 4.7UF44.1
N$135: 3.90.1 U$309.G@1
N$136: 4.7UF45.2 U$317.CE U$317.VDD U$318.4
N$137: 3.91.2 4.7UF45.1
N$138: 3.92.1 U$316.G@1
N$139: 4.7UF46.2 U$324.CE U$324.VDD U$325.4
N$140: 3.93.2 4.7UF46.1
N$141: 3.94.1 U$323.G@1
N$142: 4.7UF47.2 U$331.CE U$331.VDD U$332.4
N$143: 3.95.2 4.7UF47.1
N$144: 3.96.1 U$330.G@1
N$145: 4.7UF48.2 U$338.CE U$338.VDD U$339.4
N$146: 3.97.2 4.7UF48.1
N$147: 3.98.1 U$337.G@1
N$148: 4.7UF49.2 U$345.CE U$345.VDD U$346.4
N$149: 3.99.2 4.7UF49.1
N$150: 3.100.1 U$344.G@1
N$151: 4.7UF50.2 U$352.CE U$352.VDD U$353.4
N$152: 3.101.2 4.7UF50.1
N$153: 3.102.1 U$351.G@1
N$154: 4.7UF51.2 U$359.CE U$359.VDD U$360.4
N$155: 3.103.2 4.7UF51.1
N$156: 3.104.1 U$358.G@1
N$157: 4.7UF52.2 U$366.CE U$366.VDD U$367.4
N$158: 3.105.2 4.7UF52.1
N$159: 3.106.1 U$365.G@1
N$160: 4.7UF53.2 U$373.CE U$373.VDD U$374.4
N$161: 3.107.2 4.7UF53.1
N$162: 3.108.1 U$372.G@1
N$163: 4.7UF54.2 U$380.CE U$380.VDD U$381.4
N$164: 3.109.2 4.7UF54.1
N$165: 3.110.1 U$379.G@1
N$166: 4.7UF55.2 U$387.CE U$387.VDD U$388.4
N$167: 3.111.2 4.7UF55.1
N$168: 3.112.1 U$386.G@1
VIN: U$1.D#4 U$1.D@1 U$1.D@2 U$1.D@3 U$1.D@5 U$3.1 U$3.3 U$6.P$1 U$8.D#4 U$8.D@1 U$8.D@2 U$8.D@3 U$8.D@5 U$10.1 U$10.3 U$13.P$1 U$15.D#4 U$15.D@1 U$15.D@2 U$15.D@3 U$15.D@5 U$17.1 U$17.3 U$20.P$1 U$22.D#4 U$22.D@1 U$22.D@2 U$22.D@3 U$22.D@5 U$24.1 U$24.3 U$27.P$1 U$29.D#4 U$29.D@1 U$29.D@2 U$29.D@3 U$29.D@5 U$31.1 U$31.3 U$34.P$1 U$36.D#4 U$36.D@1 U$36.D@2 U$36.D@3 U$36.D@5 U$38.1 U$38.3 U$41.P$1 U$43.D#4 U$43.D@1 U$43.D@2 U$43.D@3 U$43.D@5 U$45.1 U$45.3 U$48.P$1 U$50.D#4 U$50.D@1 U$50.D@2 U$50.D@3 U$50.D@5 U$52.1 U$52.3 U$55.P$1 U$57.D#4 U$57.D@1 U$57.D@2 U$57.D@3 U$57.D@5 U$59.1 U$59.3 U$62.P$1 U$64.D#4 U$64.D@1 U$64.D@2 U$64.D@3 U$64.D@5 U$66.1 U$66.3 U$69.P$1 U$71.D#4 U$71.D@1 U$71.D@2 U$71.D@3 U$71.D@5 U$73.1 U$73.3 U$76.P$1 U$78.D#4 U$78.D@1 U$78.D@2 U$78.D@3 U$78.D@5 U$80.1 U$80.3 U$83.P$1 U$85.D#4 U$85.D@1 U$85.D@2 U$85.D@3 U$85.D@5 U$87.1 U$87.3 U$90.P$1 U$92.D#4 U$92.D@1 U$92.D@2 U$92.D@3 U$92.D@5 U$94.1 U$94.3 U$97.P$1 U$99.D#4 U$99.D@1 U$99.D@2 U$99.D@3 U$99.D@5 U$101.1 U$101.3 U$104.P$1 U$106.D#4 U$106.D@1 U$106.D@2 U$106.D@3 U$106.D@5 U$108.1 U$108.3 U$111.P$1 U$113.D#4 U$113.D@1 U$113.D@2 U$113.D@3 U$113.D@5 U$115.1 U$115.3 U$118.P$1 U$120.D#4 U$120.D@1 U$120.D@2 U$120.D@3 U$120.D@5 U$122.1 U$122.3 U$125.P$1 U$127.D#4 U$127.D@1 U$127.D@2 U$127.D@3 U$127.D@5 U$129.1 U$129.3 U$132.P$1 U$134.D#4 U$134.D@1 U$134.D@2 U$134.D@3 U$134.D@5 U$136.1 U$136.3 U$139.P$1 U$141.D#4 U$141.D@1 U$141.D@2 U$141.D@3 U$141.D@5 U$143.1 U$143.3 U$146.P$1 U$148.D#4 U$148.D@1 U$148.D@2 U$148.D@3 U$148.D@5 U$150.1 U$150.3 U$153.P$1 U$155.D#4 U$155.D@1 U$155.D@2 U$155.D@3 U$155.D@5 U$157.1 U$157.3 U$160.P$1 U$162.D#4 U$162.D@1 U$162.D@2 U$162.D@3 U$162.D@5 U$164.1 U$164.3 U$167.P$1 U$169.D#4 U$169.D@1 U$169.D@2 U$169.D@3 U$169.D@5 U$171.1 U$171.3 U$174.P$1 U$176.D#4 U$176.D@1 U$176.D@2 U$176.D@3 U$176.D@5 U$178.1 U$178.3 U$181.P$1 U$183.D#4 U$183.D@1 U$183.D@2 U$183.D@3 U$183.D@5 U$185.1 U$185.3 U$188.P$1 U$190.D#4 U$190.D@1 U$190.D@2 U$190.D@3 U$190.D@5 U$192.1 U$192.3 U$195.P$1 U$197.D#4 U$197.D@1 U$197.D@2 U$197.D@3 U$197.D@5 U$199.1 U$199.3 U$202.P$1 U$204.D#4 U$204.D@1 U$204.D@2 U$204.D@3 U$204.D@5 U$206.1 U$206.3 U$209.P$1 U$211.D#4 U$211.D@1 U$211.D@2 U$211.D@3 U$211.D@5 U$213.1 U$213.3 U$216.P$1 U$218.D#4 U$218.D@1 U$218.D@2 U$218.D@3 U$218.D@5 U$220.1 U$220.3 U$223.P$1 U$225.D#4 U$225.D@1 U$225.D@2 U$225.D@3 U$225.D@5 U$227.1 U$227.3 U$230.P$1 U$232.D#4 U$232.D@1 U$232.D@2 U$232.D@3 U$232.D@5 U$234.1 U$234.3 U$237.P$1 U$239.D#4 U$239.D@1 U$239.D@2 U$239.D@3 U$239.D@5 U$241.1 U$241.3 U$244.P$1 U$246.D#4 U$246.D@1 U$246.D@2 U$246.D@3 U$246.D@5 U$248.1 U$248.3 U$251.P$1 U$253.D#4 U$253.D@1 U$253.D@2 U$253.D@3 U$253.D@5 U$255.1 U$255.3 U$258.P$1 U$260.D#4 U$260.D@1 U$260.D@2 U$260.D@3 U$260.D@5 U$262.1 U$262.3 U$265.P$1 U$267.D#4 U$267.D@1 U$267.D@2 U$267.D@3 U$267.D@5 U$269.1 U$269.3 U$272.P$1 U$274.D#4 U$274.D@1 U$274.D@2 U$274.D@3 U$274.D@5 U$276.1 U$276.3 U$279.P$1 U$281.D#4 U$281.D@1 U$281.D@2 U$281.D@3 U$281.D@5 U$283.1 U$283.3 U$286.P$1 U$288.D#4 U$288.D@1 U$288.D@2 U$288.D@3 U$288.D@5 U$290.1 U$290.3 U$293.P$1 U$295.D#4 U$295.D@1 U$295.D@2 U$295.D@3 U$295.D@5 U$297.1 U$297.3 U$300.P$1 U$302.D#4 U$302.D@1 U$302.D@2 U$302.D@3 U$302.D@5 U$304.1 U$304.3 U$307.P$1 U$309.D#4 U$309.D@1 U$309.D@2 U$309.D@3 U$309.D@5 U$311.1 U$311.3 U$314.P$1 U$316.D#4 U$316.D@1 U$316.D@2 U$316.D@3 U$316.D@5 U$318.1 U$318.3 U$321.P$1 U$323.D#4 U$323.D@1 U$323.D@2 U$323.D@3 U$323.D@5 U$325.1 U$325.3 U$328.P$1 U$330.D#4 U$330.D@1 U$330.D@2 U$330.D@3 U$330.D@5 U$332.1 U$332.3 U$335.P$1 U$337.D#4 U$337.D@1 U$337.D@2 U$337.D@3 U$337.D@5 U$339.1 U$339.3 U$342.P$1 U$344.D#4 U$344.D@1 U$344.D@2 U$344.D@3 U$344.D@5 U$346.1 U$346.3 U$349.P$1 U$351.D#4 U$351.D@1 U$351.D@2 U$351.D@3 U$351.D@5 U$353.1 U$353.3 U$356.P$1 U$358.D#4 U$358.D@1 U$358.D@2 U$358.D@3 U$358.D@5 U$360.1 U$360.3 U$363.P$1 U$365.D#4 U$365.D@1 U$365.D@2 U$365.D@3 U$365.D@5 U$367.1 U$367.3 U$370.P$1 U$372.D#4 U$372.D@1 U$372.D@2 U$372.D@3 U$372.D@5 U$374.1 U$374.3 U$377.P$1 U$379.D#4 U$379.D@1 U$379.D@2 U$379.D@3 U$379.D@5 U$381.1 U$381.3 U$384.P$1 U$386.D#4 U$386.D@1 U$386.D@2 U$386.D@3 U$386.D@5 U$388.1 U$388.3 U$391.P$1
VIN_OUT: U$1.S@1 U$1.S@2 U$5.P$1
VIN_OUT1: U$8.S@1 U$8.S@2 U$12.P$1
VIN_OUT2: U$15.S@1 U$15.S@2 U$19.P$1
VIN_OUT3: U$22.S@1 U$22.S@2 U$26.P$1
VIN_OUT4: U$29.S@1 U$29.S@2 U$33.P$1
VIN_OUT5: U$36.S@1 U$36.S@2 U$40.P$1
VIN_OUT6: U$43.S@1 U$43.S@2 U$47.P$1
VIN_OUT7: U$50.S@1 U$50.S@2 U$54.P$1
VIN_OUT8: U$57.S@1 U$57.S@2 U$61.P$1
VIN_OUT9: U$64.S@1 U$64.S@2 U$68.P$1
VIN_OUT10: U$71.S@1 U$71.S@2 U$75.P$1
VIN_OUT11: U$78.S@1 U$78.S@2 U$82.P$1
VIN_OUT12: U$85.S@1 U$85.S@2 U$89.P$1
VIN_OUT13: U$92.S@1 U$92.S@2 U$96.P$1
VIN_OUT14: U$99.S@1 U$99.S@2 U$103.P$1
VIN_OUT15: U$106.S@1 U$106.S@2 U$110.P$1
VIN_OUT16: U$113.S@1 U$113.S@2 U$117.P$1
VIN_OUT17: U$120.S@1 U$120.S@2 U$124.P$1
VIN_OUT18: U$127.S@1 U$127.S@2 U$131.P$1
VIN_OUT19: U$134.S@1 U$134.S@2 U$138.P$1
VIN_OUT20: U$141.S@1 U$141.S@2 U$145.P$1
VIN_OUT21: U$148.S@1 U$148.S@2 U$152.P$1
VIN_OUT22: U$155.S@1 U$155.S@2 U$159.P$1
VIN_OUT23: U$162.S@1 U$162.S@2 U$166.P$1
VIN_OUT24: U$169.S@1 U$169.S@2 U$173.P$1
VIN_OUT25: U$176.S@1 U$176.S@2 U$180.P$1
VIN_OUT26: U$183.S@1 U$183.S@2 U$187.P$1
VIN_OUT27: U$190.S@1 U$190.S@2 U$194.P$1
VIN_OUT28: U$197.S@1 U$197.S@2 U$201.P$1
VIN_OUT29: U$204.S@1 U$204.S@2 U$208.P$1
VIN_OUT30: U$211.S@1 U$211.S@2 U$215.P$1
VIN_OUT31: U$218.S@1 U$218.S@2 U$222.P$1
VIN_OUT32: U$225.S@1 U$225.S@2 U$229.P$1
VIN_OUT33: U$232.S@1 U$232.S@2 U$236.P$1
VIN_OUT34: U$239.S@1 U$239.S@2 U$243.P$1
VIN_OUT35: U$246.S@1 U$246.S@2 U$250.P$1
VIN_OUT36: U$253.S@1 U$253.S@2 U$257.P$1
VIN_OUT37: U$260.S@1 U$260.S@2 U$264.P$1
VIN_OUT38: U$267.S@1 U$267.S@2 U$271.P$1
VIN_OUT39: U$274.S@1 U$274.S@2 U$278.P$1
VIN_OUT40: U$281.S@1 U$281.S@2 U$285.P$1
VIN_OUT41: U$288.S@1 U$288.S@2 U$292.P$1
VIN_OUT42: U$295.S@1 U$295.S@2 U$299.P$1
VIN_OUT43: U$302.S@1 U$302.S@2 U$306.P$1
VIN_OUT44: U$309.S@1 U$309.S@2 U$313.P$1
VIN_OUT45: U$316.S@1 U$316.S@2 U$320.P$1
VIN_OUT46: U$323.S@1 U$323.S@2 U$327.P$1
VIN_OUT47: U$330.S@1 U$330.S@2 U$334.P$1
VIN_OUT48: U$337.S@1 U$337.S@2 U$341.P$1
VIN_OUT49: U$344.S@1 U$344.S@2 U$348.P$1
VIN_OUT50: U$351.S@1 U$351.S@2 U$355.P$1
VIN_OUT51: U$358.S@1 U$358.S@2 U$362.P$1
VIN_OUT52: U$365.S@1 U$365.S@2 U$369.P$1
VIN_OUT53: U$372.S@1 U$372.S@2 U$376.P$1
VIN_OUT54: U$379.S@1 U$379.S@2 U$383.P$1
VIN_OUT55: U$386.S@1 U$386.S@2 U$390.P$1